# Altium PCB LED_Driver_PCB_N.PcbDoc
Units mm, origin at the board's own origin, x right, y up, seen from the top; angles counter-clockwise.
Board outline 63.63 x 100.46 mm, 2 copper layers (Top Layer, Bottom Layer); 26 components, 15 nets, 106 pads, 90 vias.
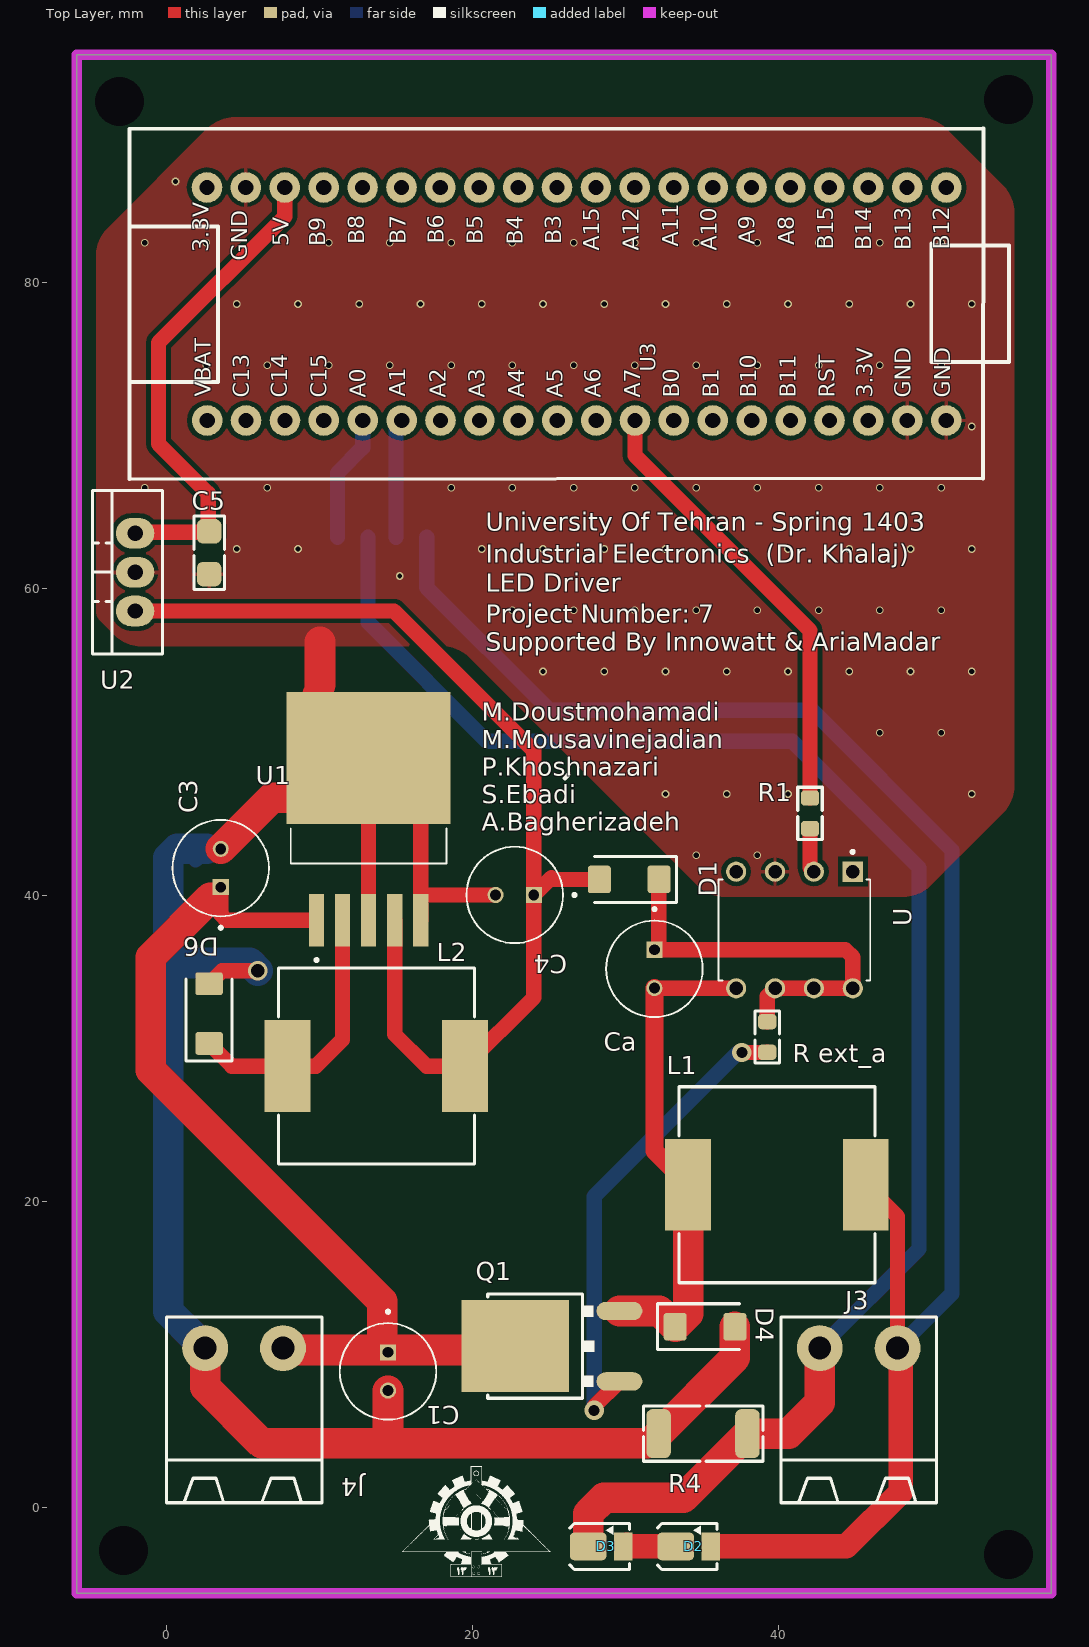
[diagram p0: Top Layer view]
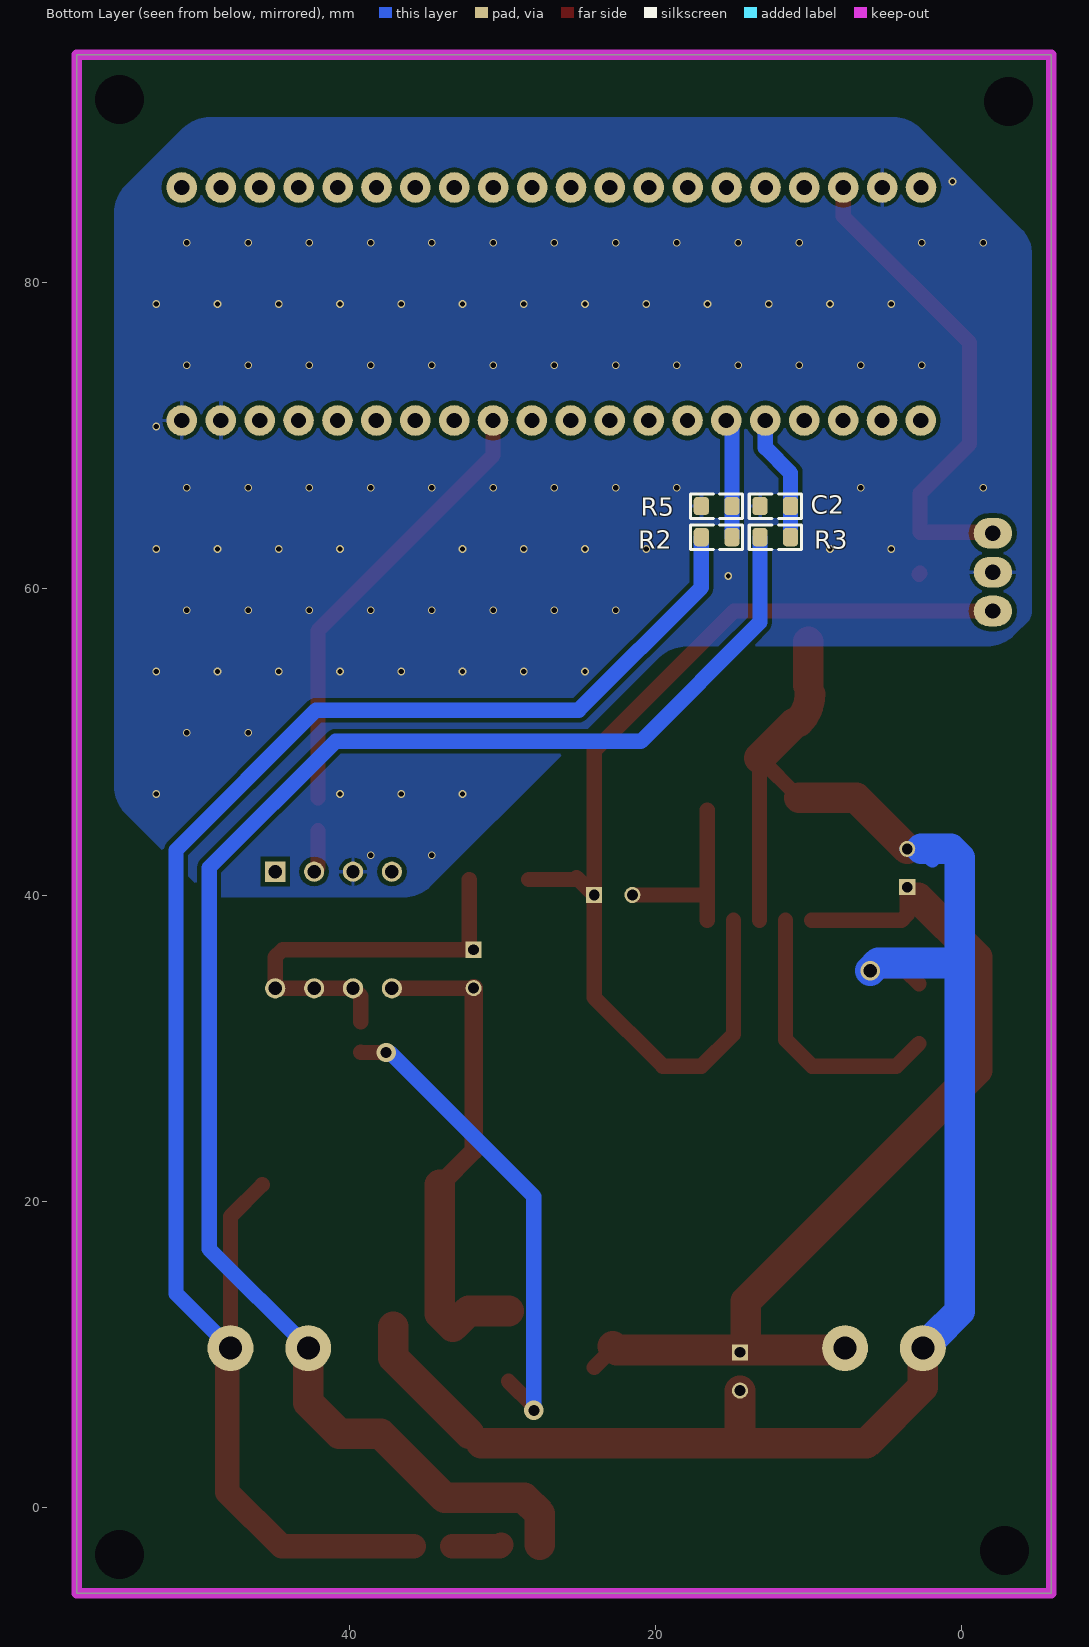
[diagram p1: Bottom Layer view, seen from below]
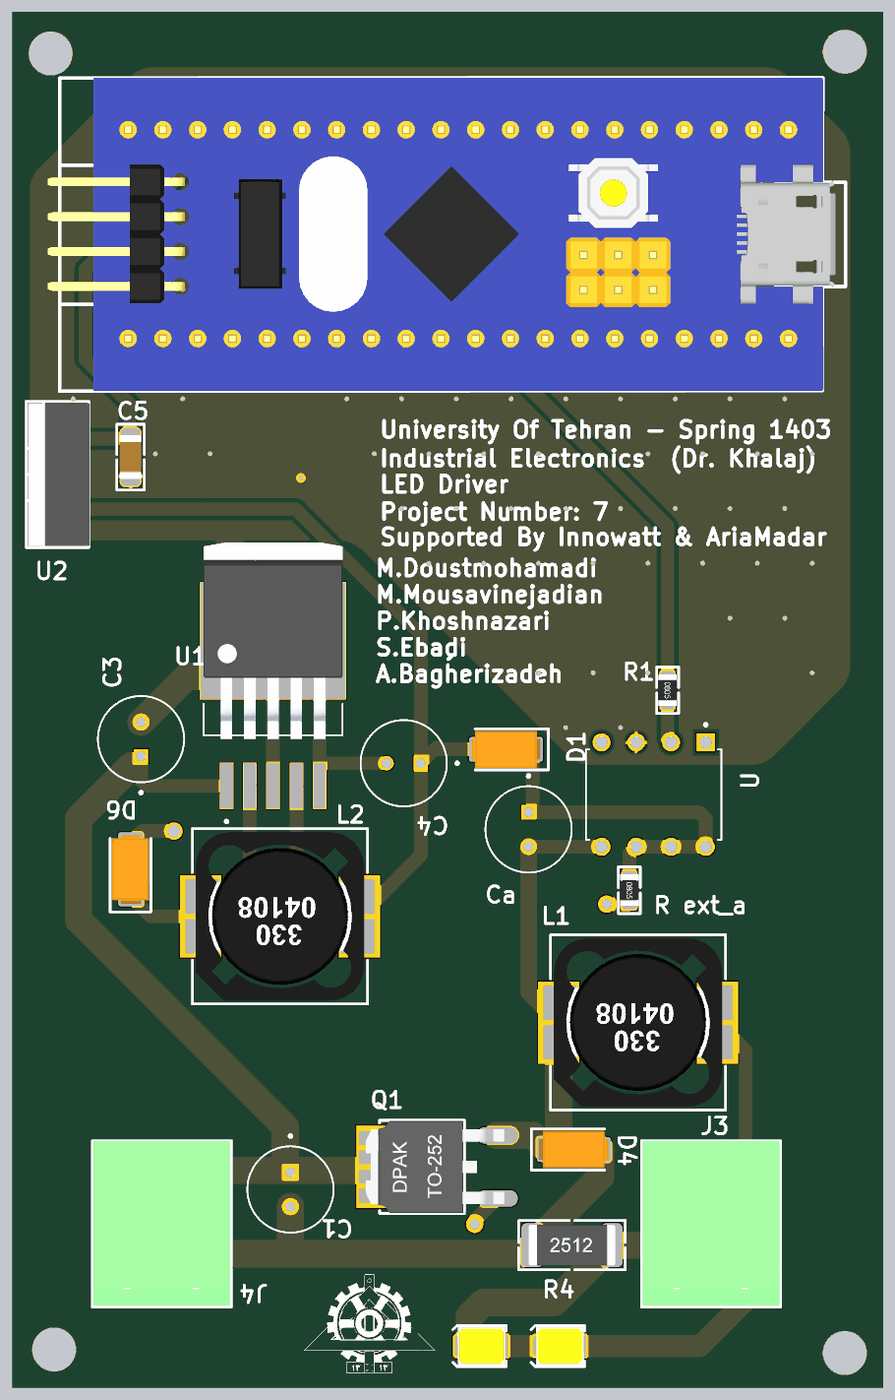
[diagram p2: 3D render of the assembled board from above, using the file's embedded part models]
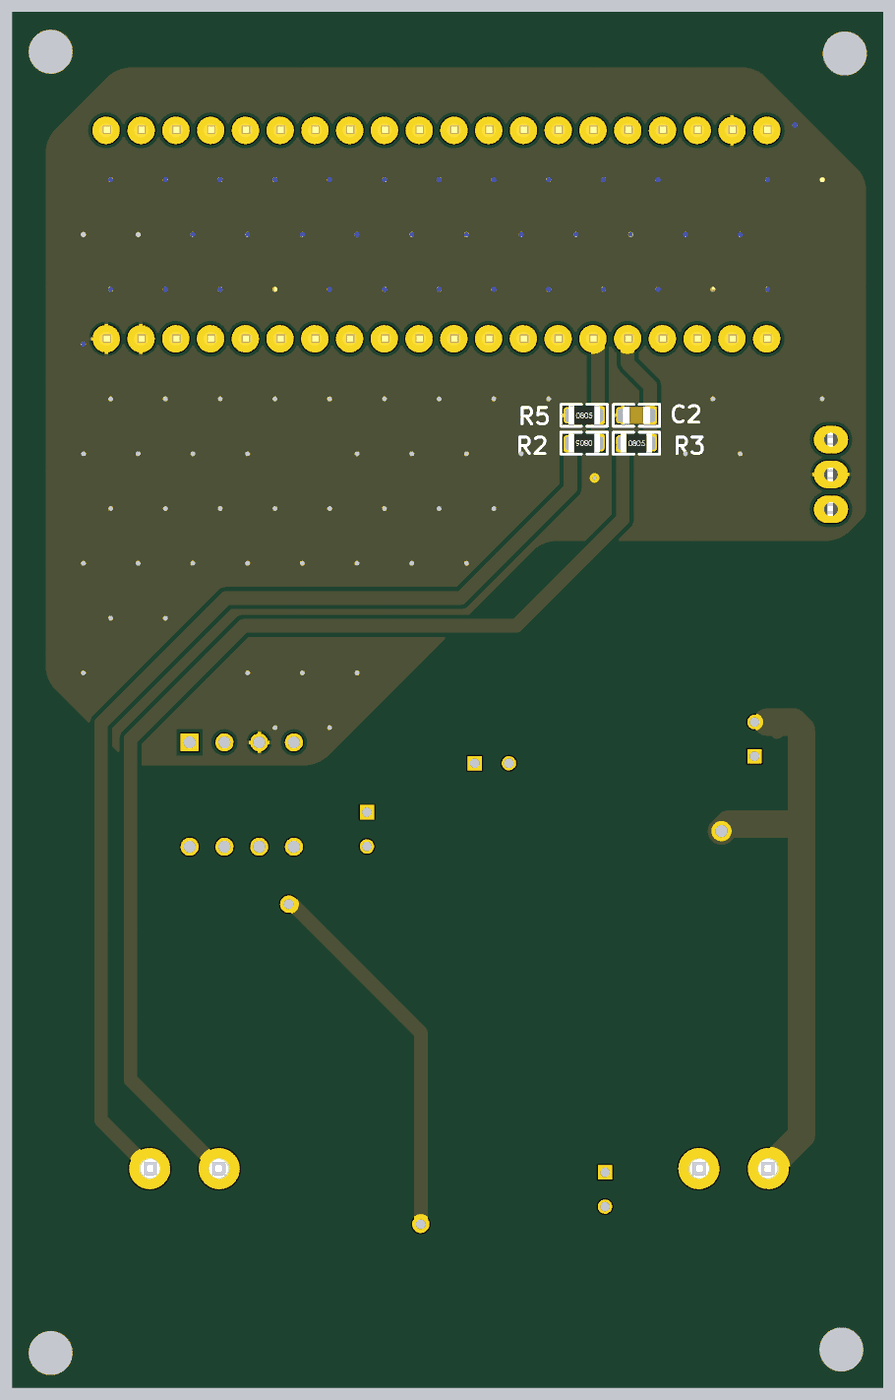
[diagram p3: 3D render of the assembled board from below, using the file's embedded part models]

## Layer stack, top to bottom
Top Solder: solder mask 0.0102, Solder Resist, Dk 3.5
Top Layer: signal copper 0.0356
Dielectric 1: dielectric 0.32, FR-4, Dk 4.8
Bottom Layer: signal copper 0.0356
Bottom Solder: solder mask 0.0102, Solder Resist, Dk 3.5

## Board outline
-5.842,-5.588 57.785,-5.588 57.785,94.869 -5.842,94.869

## Design rules (kind name [scope] priority, off if disabled: settings)
Clearance Clearance_2 [InNamedPolygon('BotPol')] p1: gap=0.3 ignorepadtopadclearanceinfootprint=FALSE
Clearance Clearance_1 [InNamedPolygon('TopPol')] p2: gap=0.3 ignorepadtopadclearanceinfootprint=FALSE
Clearance [All] p3: gap=0.508 ignorepadtopadclearanceinfootprint=FALSE
PlaneConnect [All] p1: planeconnectstyle=Direct reliefexpansion=0.508 reliefentries=4 reliefconductorwidth=0.254 reliefairgap=0.254
PolygonConnect PolygonConnect_2 [All vs IsNamedPolygon('BotPol')] p1: thpad.connectstyle=Relief thpad.reliefconductorwidth=0.254 thpad.reliefentries=4 thpad.polygonreliefangle="90 Angle" thpad.airgapwidth=0.254 smdpad.connectstyle=Relief smdpad.reliefconductorwidth=0.254 smdpad.reliefentries=4 smdpad.polygonreliefangle="90 Angle" smdpad.airgapwidth=0.254 via.connectstyle=Direct via.reliefconductorwidth=0.254 via.reliefentries=4 via.polygonreliefangle="90 Angle" via.airgapwidth=0.254
PolygonConnect PolygonConnect_1 [All vs IsNamedPolygon('TopPol')] p2: thpad.connectstyle=Relief thpad.reliefconductorwidth=0.254 thpad.reliefentries=4 thpad.polygonreliefangle="90 Angle" thpad.airgapwidth=0.254 smdpad.connectstyle=Relief smdpad.reliefconductorwidth=0.254 smdpad.reliefentries=4 smdpad.polygonreliefangle="90 Angle" smdpad.airgapwidth=0.254 via.connectstyle=Direct via.reliefconductorwidth=0.254 via.reliefentries=4 via.polygonreliefangle="90 Angle" via.airgapwidth=0.254
PolygonConnect [InNet('GND')] p3: connectstyle=Relief reliefconductorwidth=0.5 reliefentries=4 polygonreliefangle="45 Angle" airgapwidth=0.5
RoutingVias [All] p1: holewidth=0.711 width=1.27 viastyle="Through Hole" minholewidth=0.711 minwidth=1.27 maxholewidth=0.711 maxwidth=1.27
SolderMaskExpansion [All] p1: expansion=0.102
Width [All] p1: maxlimit=2 minlimit=0.254 preferedwidth=1 minimp=50.000000 maximp=50.000000 favimp=50.000000
29 further rules are at their usual default settings.

## Components (designator, comment, footprint, x,y, rotation, side; value= is the part's Value field where it differs from the comment)
C1 "UPM1C101MED" CAPPRD250W50D630H1250 14.478,8.89 r270 top value="100 uF 100V"
C2 "-F" C0805 12.176,65.405 r180 bottom
C3 "UPM1C101MED" CAPPRD250W50D630H1250 3.556,41.763 r90 top value="100 uF 100V"
C4 "UPM1C101MED" CAPPRD250W50D630H1250 22.753,40.005 r180 top value="1000 uF"
C5 "100nF" C1206 2.794,62.357 r90 top
Ca "UPM1C101MED" CAPPRD250W50D630H1250 31.877,35.179 r270 top value="10 uF 35V"
D1 "Schottky-Diode" DO-214AC_SMA 30.226,41.021 r180 top value=Shottky-Diode
D2 "LED2835" LED2835 34.163,-2.54 r180 top
D3 "LED2835" LED2835 28.448,-2.54 r180 top
D4 "Schottky-Diode" DO-214AC_SMA 35.179,11.811 r0 top value=Shottky-Diode
D6 "Schottky-Diode" DO-214AC_SMA 2.794,32.258 r90 top value=Shottky-Diode
J3 "CONN_TB2" MSTB_2 45.212,10.414 r180 top
J4 "CONN_TB2" MSTB_2 5.08,10.414 r180 top
L1 "220UH" L_12 39.878,21.082 r0 top
L2 "220uH" L_12 13.716,28.829 r0 top
Q1 "IRFR3709" DPAK_3 29.591,10.541 r90 top
R1 "2K" R0805 42.037,45.339 r270 top
R2 "3K" R0805 16.002,63.373 r0 bottom
R3 "1K" R0805 12.176,63.373 r180 bottom
R4 "2.2K" R2512 35.052,4.826 r0 top
R5 "3K" R0805 16.002,65.405 r180 bottom
"R ext_a" "27" R0805 39.243,30.734 r270 top
U "HCPL-3120-000E" DIP762W65P254L990H470Q8 41.021,37.719 r270 top
U1 "LM2576HVS-12/NOPB" VREG_TPS79625KTTR 13.208,48.954 r90 top
U2 "MC78M05" TO220_3 -2.032,61.087 r90 top
U3 "STM32F103C8T6" "Stm32 BluePill" 21.033,78.379 r90 top

## Footprints (in the part's own frame and the unit in brackets; to place one, negate y for a bottom-side part, rotate by r counter-clockwise, add the part's x,y. Pads: shape width x height; smd on the part's side, far side on the other; paste and mask are expansions set on the pad)
C0805 [mm] "CHIP Capacitor, 2.0X1.3mm, 0805"
  rrect50% 1x1.2 smd paste-0.1 mask+0.075: 1(-1,0) 2(1,0)
  Top Layer pour cut-out: -0.5,0.8 0.5,0.8 0.5,-0.8 -0.5,-0.8
  silkscreen extent -1.7,-0.8 1.7,0.8, body extent -1,-0.63 1,0.63, height 1
C1206 [mm] "CHIP Capacitor, 3.2X1.6mm, 1206"
  rrect50% 1.6x1.6 smd paste-0.8 mask+0.075: 1(-1.4,0) 2(1.4,0)
  Top Layer pour cut-out: -0.8,1 -0.8,-1 0.8,-1 0.8,1
  silkscreen extent -2.4,-1 2.4,1, body extent -1.6,-0.8 1.6,0.8, height 1
CAPPRD250W50D630H1250 [mm]
  round 1.05 hole 0.7: N(1.25,0)
  rect 1.05x1.05 hole 0.7: P(-1.25,0)
  silkscreen extent -4,-3.15 3.15,3.15
DIP762W65P254L990H470Q8 [mm]
  rect 1.32x1.32 hole 0.88: 1(-3.81,3.81)
  round 1.32 hole 0.88: 2(-3.81,1.27) 3(-3.81,-1.27) 4(-3.81,-3.81) 5(3.81,-3.81) 6(3.81,-1.27) 7(3.81,1.27) 8(3.81,3.81)
  silkscreen extent -5.2,-4.95 3.3,4.95
DO-214AC_SMA [mm]
  rrect25% 1.5x1.8 smd: A(1.95,0) K(-1.95,0)
  silkscreen extent -3.1,-1.5 2.25,1.5, body extent -2.53,-1.35 2.52,1.35, height 2.17
DPAK_3 [mm] "D-PAK (TO-252), 3-Pads, Body 6.2x6.7mm"
  oval 1.2x3 smd: 1(-2.3,0) 3(2.3,0)
  rect 6x7 smd paste-5: 4(0,6.8)
  silkscreen extent -3.4,1.63 3.4,8.6, body extent -3.37,-0.5 3.37,9.6, height 2.37
L_12 [mm] "INDUCTOR, 13.5x12.5mm, DR125, CDRH127, D128C 931AS"
  rect 3x6 smd paste-4: 1(-5.8,0) 2(5.8,0)
  Top Layer pour cut-out: -4.699,6.096 4.953,6.096 4.953,-6.096 -4.699,-6.096
  silkscreen extent -6.4,-6.4 6.4,6.4, body extent -6.16,-6.15 6.16,6.15, height 8.16
LED2835 [mm] "LED 2.8mmX3.5mm"
  rect 1.2x1.8 smd paste-0.117 mask+0.1: 1(-1.4,0)
  rrect30% 2.4x1.8 smd paste-0.168 mask+0.1: 2(0.9,0)
  silkscreen extent -1.8,-1.5 2.1,1.5, body extent -1.76,-1.4 1.76,1.4, height 0.72
MSTB_2 [mm] "PHOENIX MSTB 2, 5-G, 5.08mm pitch, 2pin"
  round 3 hole 1.5: 1(-2.54,0) 2(2.54,0)
  silkscreen extent -5.08,-2.03 5.08,10.1, body extent -5,-2 5,10, height 8.7
R0805 [mm] "CHIP RESISTOR 1/8 WATT ,2.0X1.3mm, 0805, 2012"
  rrect50% 1x1.2 smd paste-0.1 mask+0.075: 1(-1,0) 2(1,0)
  Top Layer pour cut-out: -0.5,0.8 0.5,0.8 0.5,-0.8 -0.5,-0.8
  silkscreen extent -1.7,-0.8 1.7,0.8, body extent -1.15,-0.67 1.15,0.68, height 0.76
R2512 [mm] "CHIP RESISTOR 1 WATT, 6.4X3.2mm, 2512, 6432"
  rrect50% 1.6x3.2 smd: 1(-2.9,0) 2(2.9,0)
  Top Layer pour cut-out: -2.4,1.9 2.4,1.9 2.4,-1.9 -2.4,-1.9
  silkscreen extent -3.9,-1.8 3.9,1.8, body extent -3.17,-1.5 3.18,1.5, height 1.6
"Stm32 BluePill" [mm]
  round 2 hole 1: 1(7.828,-29.909) 2(7.828,-27.343) 3(7.828,-24.803) 4(7.828,-22.263) 5(7.828,-19.723) 6(7.828,-17.183) 7(7.828,-14.643) 8(7.828,-12.103) 9(7.828,-9.563) 10(7.828,-7.023) 11(7.828,-4.483) 12(7.828,-1.943) 13(7.828,0.597) 14(7.828,3.137) 15(7.828,5.677) 16(7.828,8.217) 17(7.828,10.757) 18(7.828,13.297) 19(7.828,15.837) 20(7.828,18.377) 21(-7.386,18.366) 22(-7.386,15.826) 23(-7.386,13.286) 24(-7.386,10.746) 25(-7.386,8.206) 26(-7.386,5.666) 27(-7.386,3.126) 28(-7.386,0.586) 29(-7.386,-1.954) 30(-7.386,-4.494) 31(-7.386,-7.034) 32(-7.386,-9.574) 33(-7.386,-12.114) 34(-7.386,-14.654) 35(-7.386,-17.194) 36(-7.386,-19.734) 37(-7.386,-22.274) 38(-7.386,-24.814) 39(-7.386,-27.354) 40(-7.386,-29.894)
  silkscreen extent -11.22,-34 11.69,23.43, body extent -11.18,-33.27 11.68,24.29, height 12.31
TO220_3 [mm] "TO-220 3 LEAD, TO-262, pitch: 2.54mm  10x4.5mm"
  oval 2x2.5 hole 1: 1(-2.54,0) 2(0,0) 3(2.54,0)
  silkscreen extent -5.33,-1.78 5.33,2.79, body extent -5.2,-1.85 5.2,2.65, height 19
VREG_TPS79625KTTR [mm]
  rect 3.4x1 smd paste-0.05 mask+0.07: 1(-10.6,3.4) 2(-10.6,1.7) 3(-10.6,0) 4(-10.6,-1.7) 5(-10.6,-3.4)
  rect 8.6x10.7 smd paste-0.05 mask+0.07: 6(0,0)
  silkscreen extent -13.3,-5.08 -4.62,5.08, body extent -7.18,-5.08 7.18,5.08, height 4.65

## Part data
C1 C3 C4 Ca: "100µF 16V Aluminum Electrolytic Capacitors Radial, Can 2000 Hrs @ 105°C", Package="Radial Nichicon", Availability=Good, Check_prices=https://www.snapeda.com/parts/UPM1C101MED/Nichicon/view-part/226477/?ref=eda, MF=Nichicon, MP=UPM1C101MED, PRICE=None, Purchase-URL=https://pricing.snapeda.com/search/part/UPM1C101MED/?ref=eda, SnapEDA_Link=https://www.snapeda.com/parts/UPM1C101MED/Nichicon/view-part/226477/?ref=snap
C2: library part CAP_SMD_MLCC_0805, "CAP, MLCC", ASSEMBLY=ASSEMBLY, MANF=-, MANF_P#=MANF_PART#, PARAM="-, -%", PARAM2=-V, PRICE="100= 1$"
C5: library part CAP_SMD_MLCC_1206, "CAP, MLCC", ASSEMBLY=ASSEMBLY, MANF=-, MANF_P#=MANF_PART#, PARAM="-, -%", PARAM2=-V, PRICE="100= 1$"
D2 D3: library part LED_SMD_2835, "LED, SMD, 2835", ASSEMBLY=ASSEMBLY, DESC=DESCRIPTION, MANF=MANF, MANF_P#=MANF_PART#, PARAM2="9V, 1W", PRICE=PRICE
J3 J4: library part CONN_MSTB_2, "CONN, PHOENIX MSTB, 5-G, 5.08mm pitch", PARAM=12A, PARAM2=320V
L1 L2: library part INDPWR_SMD, "INDUCTOR, POWER, SMD"
Q1: library part MOSN_IRFR3709_DPAK, "MOSFET, N-CH, 30V, 86A, 6.5mRDS, 2300pF", ASSEMBLY=ASSEMBLY, DESC="HEXFET Power MOSFET", MANF_P#=IRFR3709Z, PARAM="86A, 6.5mRDS, 2300pF, -55~175oC", PARAM2="30VDS, 1.3~2.2VGSth", PRICE=1500t@PAYA
R1 R2 R3 R5 "R ext_a": library part RES_SMD_0805, "RESISTOR, SMD", ASSEMBLY=ASSEMBLY, DESC=DESCRIPTION, DIST#=MOUSER, MANF=-, MANF_P#=-, PARAM=-W, PARAM2=1%, PRICE="100= 0.5$"
R4: library part RES_SMD_2512, "RESISTOR, SMD", ASSEMBLY=ASSEMBLY, DESC=DESCRIPTION, DIST#=MOUSER, MANF=-, MANF_P#=-, PARAM="1%, 1W", PARAM2=-, PRICE=-
U: "2.5A Gate Driver Optical Coupling 3750Vrms 1 Channel 8-DIP", Package="DIP-8 Broadcom", Availability=Unavailable, MF="Broadcom Limited", MP=HCPL-3120-000E, PRICE=None, SnapEDA_Link=https://www.snapeda.com/parts/HCPL-3120-000E/Broadcom%20Limited/view-part/1774478/?ref=snap
U1: "SIMPLE SWITCHER&reg; 4V to 60V, 3A Low Component Count Step-Down Regulator 5-DDPAK/TO-263 -40 to 125", Package="TO-263-5 Texas Instruments", Availability="In Stock", Check_prices=https://www.snapeda.com/parts/LM2576HVS-12/Texas+Instruments/view-part/?ref=eda, MF="Texas Instruments", MP=LM2576HVS-12, PRICE=None, Purchase-URL=https://pricing.snapeda.com/search/part/LM2576HVS-12/?ref=eda, SnapEDA_Link=https://www.snapeda.com/parts/LM2576HVS-12/Texas+Instruments/view-part/?ref=snap
U2: library part VREG_78M05_TO220, "REG, Linear, Fixed, 5v, 1.5A, TO-220", MANF="TI, ST, FAIRCHILD, ON, NJR, TS", MANF_P#="LM78M05CT, LM7805CT, LM7805ACT, UA7805CKC, L7805ABV, L7805ACV, L7805CV, L78M05CV, KA78T05, KA7805ETU, MC78M05BT, MC78M05CT, MC7805ACT, MC7805ABT, NCP7805TG, NJM7805FA, TS7805CZ", PARAM="5v, 1.5A", PARAM2=PARAM2
U3: library part BluePill, "Designed By @Alixahedi"
D1 D4 D6: Datasheet=https://diotec.com/de/produktliste/SBD.html, ki_description="Schottky Diode", ki_keywords=Schottky, Reference=D

## Free pads (board coordinates)
  round 1.524 hole 3.2: 2(54.991,91.948) 3(-3.048,91.821) 5(-2.794,-2.794) 5(54.991,-3.048)

## Via types
v1: diameter 0.5, hole 0.35, Top Layer to Bottom Layer, tented both sides, 86 vias
v2: diameter 1.27, hole 0.711, Top Layer to Bottom Layer, 2 vias
v3: diameter 0.5, hole 0.3, Top Layer to Bottom Layer, 1 vias
v4: diameter 1.27, hole 0.889, Top Layer to Bottom Layer, 1 vias

## Nets (pads, with @x,y where several pads share a name; then routed paths per layer and width w, separated by ;. In a path a pad name is that pad's centre, name@x,y a point inside that pad or via, vN(x,y) a via of type N, cw(c..) or ccw(c..) an arc to the next point about the centre after c; other vN are vias at no path point)
GND: C1.N C2.1 C3.N C4.N C5.1 D4.A D6.A J4.2 R4.1 R5.1 U1.3 U1.5 U1.6 U2.2 U3.19 U3.39 U3.40 U.3 | length 135.6
  Top Layer w1: U2.2 U2.2@-1.967,61.022 ; C5.1@2.729,61.022 C5.1 ; D6.A 3.638,35.052 v4@5.842,35.052 ; U1.6@10.609,46.355 U1.6 U1.3 ; U1.5 U1.6@16.608,45.554 ; U1.5@16.862,40.005 C4.N
  Top Layer w2: J4.2 2.54,7.874 6.223,4.191 14.478,4.191 ; C3.N 6.898,46.355 U1.6@10.609,46.355 ; U1.6@9.906,53.122 ccw(c12.446,53.122) 10.65,51.326 10.668,51.308 cw(c10.668,50.859) 10.986,51.176 U1.6 ; 10.033,53.721 10.033,56.539 ; C1.N 14.478,4.191 ; R4.1@31.372,4.191 14.478,4.191 ; R4.1 37.129,9.803 D4.A
  Bottom Layer w1: J4.2@1.905,11.049 J4.2 ; 1.905,42.291 2.627,43.013 C3.N
  Bottom Layer w2: J4.2@1.905,11.049 0.127,12.827 0.127,35.56 ; 2.627,43.013 0.722,43.013 0.127,42.418 0.127,35.56 ; v4(5.969,35.052) 5.461,35.56 0.127,35.56
  other v1: 34.6,42.6 38.6,42.6 32.6,46.6 36.6,46.6 40.6,46.6 52.6,46.6 46.6,50.6 50.6,50.6 24.6,54.6 28.6,54.6 32.6,54.6 36.6,54.6 40.6,54.6 44.6,54.6 48.6,54.6 52.6,54.6 22.6,58.6 26.6,58.6 30.6,58.6 34.6,58.6 38.6,58.6 42.6,58.6 46.6,58.6 50.6,58.6 4.6,62.6 8.6,62.6 20.6,62.6 24.6,62.6 28.6,62.6 32.6,62.6 40.6,62.6 44.6,62.6 48.6,62.6 52.6,62.6 -1.4,66.6 6.6,66.6 18.6,66.6 22.6,66.6 26.6,66.6 30.6,66.6 34.6,66.6 38.6,66.6 42.6,66.6 46.6,66.6 50.6,66.6 52.6,70.6 2.6,74.6 6.6,74.6 10.6,74.6 14.6,74.6 18.6,74.6 22.6,74.6 26.6,74.6 30.6,74.6 34.6,74.6 38.6,74.6 42.6,74.6 46.6,74.6 50.6,74.6 4.6,78.6 8.6,78.6 12.6,78.6 16.6,78.6 20.6,78.6 24.6,78.6 28.6,78.6 32.6,78.6 36.6,78.6 40.6,78.6 44.6,78.6 48.6,78.6 52.6,78.6 -1.4,82.6 2.6,82.6 10.6,82.6 14.6,82.6 18.6,82.6 22.6,82.6 26.6,82.6 30.6,82.6 34.6,82.6 38.6,82.6 42.6,82.6 46.6,82.6 50.6,82.6 0.6,86.6
  other v3: 15.24,60.833
NetC1_P: C1.P C3.P J4.1 Q1.4 U1.1 | length 63.5
  Top Layer w1: 2.857,39.814 C3.P 3.556,38.735 3.937,38.354 U1.1 ; Q1.4@22.664,10.414 22.733,10.414 Q1.4@24.003,9.144
  Top Layer w2: 2.857,39.814 -1.016,35.941 -1.016,28.575 14.097,13.462 14.097,11.43 ; J4.1 7.747,10.287 22.537,10.287 22.664,10.414 Q1.4
  Bottom Layer w1: J4.1 J4.1@7.62,11.303
NetC2_2: C2.2 R3.2 U3.25 | length 8.3
  Bottom Layer w1: R3.2 C2.2 11.176,67.564 12.827,69.215 U3.25
NetC4_P: C4.P D1.A L2.2 U1.4 U2.1 | length 70.1
  Top Layer w1: U2.1 14.867,58.547 24.003,49.411 C4.P ; U1.4 14.908,30.91 16.989,28.829 L2.2 24.003,33.316 C4.P ; 25.15,41.152 25.019,41.021 ; D1.A 25.019,41.021 ; C4.P 25.019,41.021
NetC5_2: C5.2 U2.3 U3.18 | length 32.1
  Top Layer w1: U2.3 -1.967,63.692 2.729,63.692 2.729,66.232 -0.508,69.469 -0.508,76.073 7.736,84.317 U3.18
NetCa_N: Ca.N D4.K L1.1 Q1.3 U.5 | length 32.3
  Top Layer w1: Ca.N@32.131,33.909 U.5@36.957,33.909
  Top Layer w1.2: Ca.N 31.877,23.283 L1.1
  Top Layer w2: Q1.3 32.199,12.841 D4.K 34.078,12.66 L1.1
NetCa_P: "R ext_a.1" Ca.P D1.K U.6 U.7 U.8 | length 30.9
  Top Layer w1: Ca.P Ca.P@32.156,36.429 ; Ca.P@32.176,36.449 D1.K@32.176,40.132 ; D1.K 32.156,41.001 Ca.P@32.156,36.429 ; 39.243,31.734 39.243,33.401 U.6 U.7 U.8 44.831,35.941 44.343,36.429 Ca.P@32.156,36.429
NetD2_1: D2.1 J3.1 L1.2 R2.2 | length 113.4
  Top Layer w1: L1.2 47.752,19.008 J3.1
  Top Layer w1.6: D2.1@35.771,-2.54 44.407,-2.54 47.963,1.016 47.963,10.203 J3.1
  Bottom Layer w1: R2.2 17.002,60.087 25.019,52.07 42.164,52.07 51.308,42.926 51.308,13.97 J3.1
NetD2_2: D2.2 D3.1 | length 3.3
  Top Layer w1.6: D3.1@30.056,-2.413 30.183,-2.54 D2.2
NetD3_2: D3.2 J3.2 R3.1 R4.2 | length 106.5
  Top Layer w1: J3.2@42.289,10.797 J3.2
  Top Layer w2: D3.2@27.548,-2.413 27.548,-0.392 28.575,0.635 33.761,0.635 R4.2 40.64,4.826 42.672,6.858 J3.2
  Bottom Layer w1: R3.1 13.176,57.817 20.955,50.038 40.894,50.038 49.149,41.783 49.149,16.891 J3.2
NetD6_K: D6.K L2.1 U1.2 | length 17.8
  Top Layer w1: D6.K 4.273,28.829 L2.1 9.779,28.829 11.508,30.558 U1.2
NetQ1_1: "R ext_a.2" Q1.1 | length 31.7
  Top Layer w1: v2(27.94,6.35) 27.94,6.59 Q1.1 ; v2(37.592,29.718) 39.227,29.718 39.243,29.734
  Bottom Layer w1: v2(27.94,6.35) 27.94,20.32 37.338,29.718 v2(37.592,29.718)
NetR1_1: R1.1 U3.32 | length 29.4
  Top Layer w1: U3.32 30.607,68.707 42.037,57.277 R1.1
NetR1_2: R1.2 U.2 | length 2.8
  Top Layer w1: R1.2@42.037,44.212 42.037,41.783 U.2
NetR2_1: R2.1 R5.2 U3.26 | length 7.8
  Bottom Layer w1: R2.1 R5.2 15.002,70.628 U3.26
pads on no net: U3.1 U3.2 U3.3 U3.4 U3.5 U3.6 U3.7 U3.8 U3.9 U3.10 U3.11 U3.12 U3.13 U3.14 U3.15 U3.16 U3.17 U3.20 U3.21 U3.22 U3.23 U3.24 U3.27 U3.28 U3.29 U3.30 U3.31 U3.33 U3.34 U3.35 U3.36 U3.37 U3.38 U.1 U.4

## Polygon pours and split planes (outlines as drawn)
GND on Top Layer "TopPol" (solid, remove dead copper, pour order 6): 2.685,90.061 cw(c4.481,88.265) 4.481,90.805 49.113,90.805 cw(c49.113,88.265) 50.909,90.061 54.628,86.342 cw(c52.832,84.546) 55.372,84.546 55.372,47.153 cw(c52.832,47.153) 54.628,45.357 49.893,40.622 cw(c48.097,42.418) 48.097,39.878 36.485,39.878 cw(c36.485,42.418) 34.689,40.622 19.794,55.517 ccw(c17.998,53.721) 17.998,56.261 -1.615,56.261 cw(c-1.615,58.801) -3.411,57.005 -4.318,57.912 cw(c-3.705,58.525) -4.572,58.525 -4.572,81.788 cw(c-2.119,81.788) -3.854,83.522
GND on Bottom Layer "BotPol" (solid, remove dead copper, pour order 8): 2.667,90.043 cw(c4.463,88.247) 4.463,90.787 49.095,90.787 cw(c49.095,88.247) 50.891,90.043 54.61,86.324 cw(c52.814,84.528) 55.354,84.528 55.354,47.135 cw(c52.814,47.135) 54.61,45.339 49.875,40.604 cw(c48.079,42.4) 48.079,39.86 36.467,39.86 cw(c36.467,42.4) 34.671,40.604 19.776,55.499 ccw(c17.98,53.703) 17.98,56.243 -1.633,56.243 cw(c-1.633,58.783) -3.429,56.987 -4.336,57.894 cw(c-3.723,58.507) -4.59,58.507 -4.59,81.77 cw(c-2.137,81.77) -3.872,83.504

## Keep-outs
Keep-Out Layer:
  lines w0.7: -5.842,-5.588 -5.842,94.869 57.785,94.869 57.785,94.107 57.785,-5.588 -5.842,-5.588

## Silkscreen, mask and mechanical layers (free items; w line width, h text height)
Top Overlay:
  drawing of 12 lines, arcs and shapes, not listed
  text "University Of Tehran - Spring 1403" at 20.866,63.798 h1.2
  text "Industrial Electronics  (Dr. Khalaj)" at 20.866,61.698 h1.2
  text "LED Driver" at 20.866,59.809 h1.2
  text "Project Number: 7" at 20.866,57.799 h1.2
  text "Supported By Innowatt & AriaMadar" at 20.866,55.961 h1.2
  text "M.Doustmohamadi / M.Mousavinejadian / P.Khoshnazari / S.Ebadi / A.Bagherizadeh" at 20.612,44.196 h1.2

## Text inside footprints (layer, text, board x,y; h text height)
U3: Top Overlay "B12" at 51.488,82.128 h1.78 r90; Top Overlay "GND" at 51.544,72.466 h1.78 r90; Top Overlay "B13" at 48.979,82.118 h1.78 r90; Top Overlay "GND" at 48.979,72.466 h1.78 r90; Top Overlay "A1" at 15.953,72.537 h1.78 r90; Top Overlay "A0" at 13.393,72.466 h1.78 r90; Top Overlay "C14" at 8.262,72.466 h1.78 r90; Top Overlay "C13" at 5.773,72.466 h1.78 r90; Top Overlay "C15" at 10.828,72.466 h1.78 r90; Top Overlay "B6" at 18.473,82.53 h1.78 r90; Top Overlay "B4" at 23.624,82.466 h1.78 r90; Top Overlay "B7" at 16.004,82.499 h1.78 r90; Top Overlay "B14" at 46.408,82.098 h1.78 r90; Top Overlay "B5" at 21.039,82.499 h1.78 r90; Top Overlay "VBAT" at 3.253,72.539 h1.78 r90; Top Overlay "A10" at 36.304,82.065 h1.78 r90; Top Overlay "A12" at 31.218,82.065 h1.78 r90; Top Overlay "A15" at 28.633,82.065 h1.78 r90; Top Overlay "A9" at 38.793,82.466 h1.78 r90; Top Overlay "B3" at 26.144,82.499 h1.78 r90; Top Overlay "A11" at 33.784,82.352 h1.78 r90; Top Overlay "A8" at 41.359,82.436 h1.78 r90; Top Overlay "B15" at 43.924,82.128 h1.78 r90; Top Overlay "3.3V" at 46.489,72.466 h1.78 r90; Top Overlay "B1" at 36.425,72.466 h1.78 r90; Top Overlay "B0" at 33.866,72.466 h1.78 r90; Top Overlay "A7" at 31.32,72.466 h1.78 r90; Top Overlay "A6" at 28.735,72.466 h1.78 r90; Top Overlay "B11" at 41.48,72.466 h1.78 r90; Top Overlay "B10" at 38.895,72.466 h1.78 r90; Top Overlay "RST" at 44.026,72.466 h1.78 r90; Top Overlay "A4" at 23.725,72.466 h1.78 r90; Top Overlay "A3" at 21.14,72.466 h1.78 r90; Top Overlay "A2" at 18.595,72.466 h1.78 r90; Top Overlay "A5" at 26.246,72.466 h1.78 r90; Top Overlay "GND" at 5.646,81.427 h1.78 r90; Top Overlay "3.3V" at 3.132,81.991 h1.78 r90; Top Overlay "B8" at 13.292,82.499 h1.78 r90; Top Overlay "B9" at 10.752,82.372 h1.78 r90; Top Overlay "5V" at 8.339,82.372 h1.78 r90